# Altium PCB PCB1.PcbDoc
Units mil, origin at the board's own origin, x right, y up, seen from the top; angles counter-clockwise.
Board outline 999.85 x 2459.78 mil, 2 copper layers (Top Layer, Bottom Layer); 18 components, 21 nets, 95 pads, 47 vias.
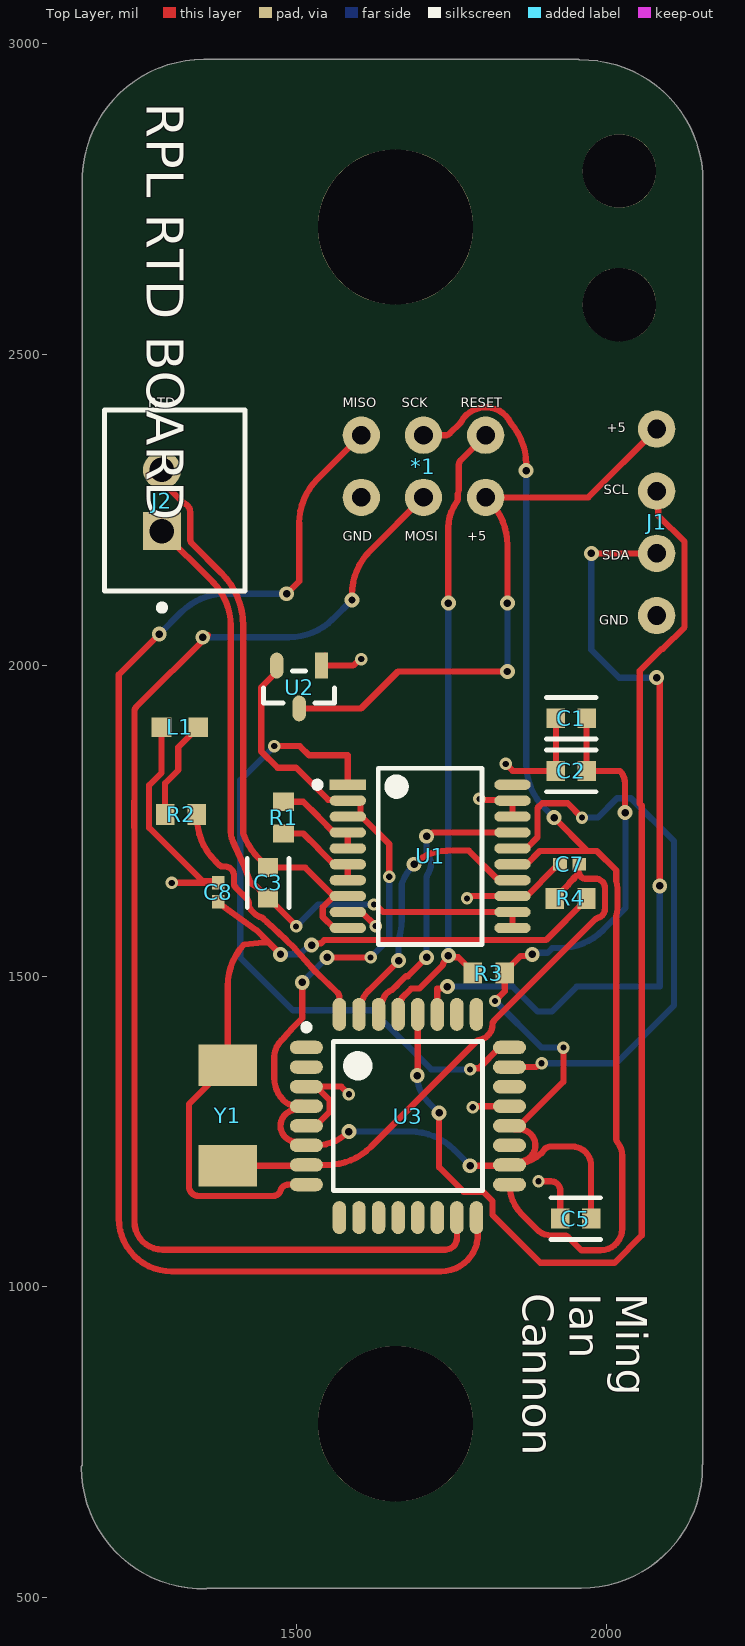
[diagram p0: Top Layer view]
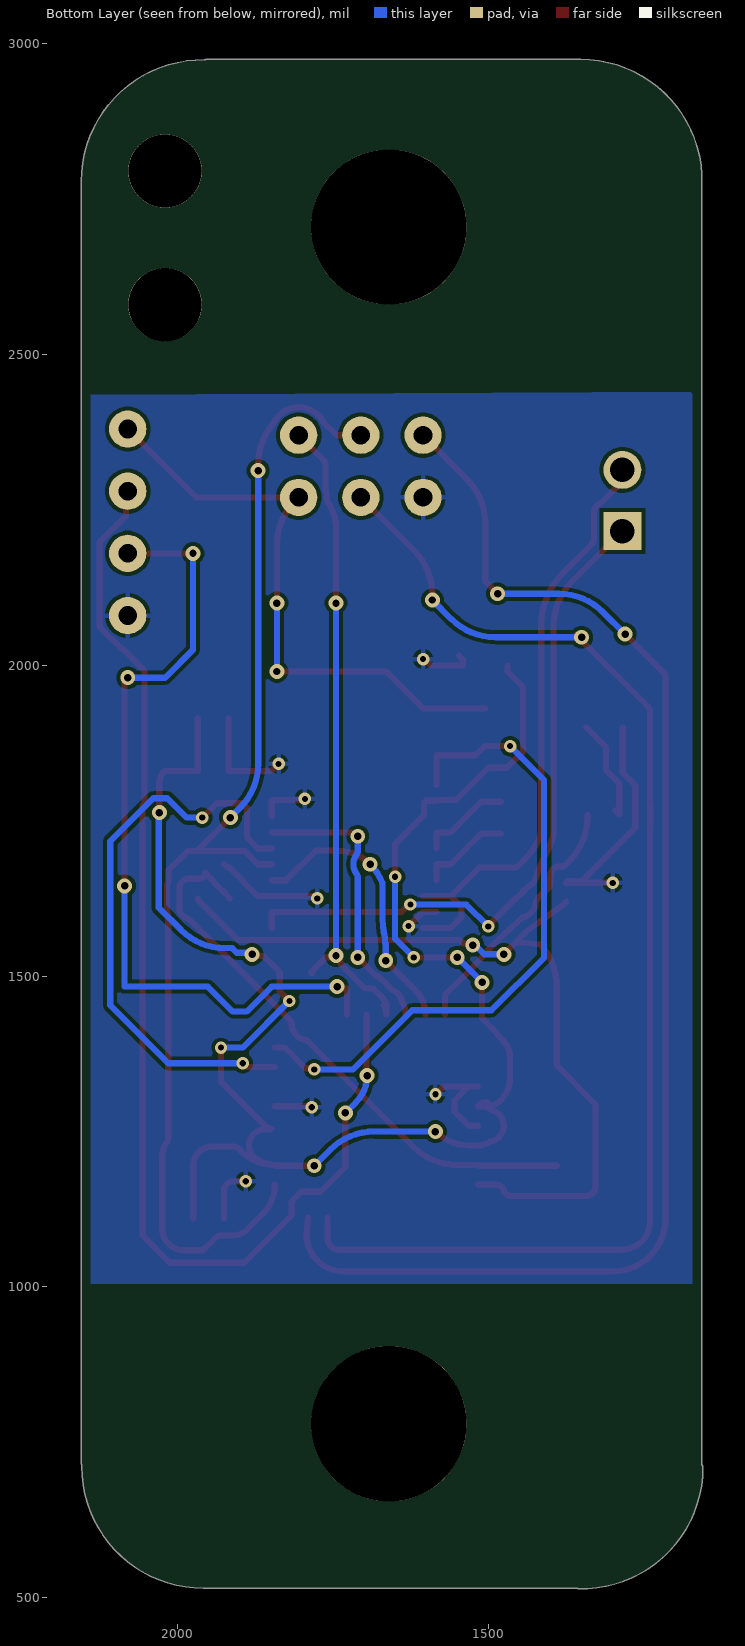
[diagram p1: Bottom Layer view, seen from below]

## Layer stack, top to bottom
Top Solder: solder mask 0.4, Solder Resist, Dk 3.5
Top Layer: signal copper 1.4
Dielectric 1: dielectric 12.6, FR-4, Dk 4.8
Bottom Layer: signal copper 1.4
Bottom Solder: solder mask 0.4, Solder Resist, Dk 3.5

## Board outline
1154.72,710 cw(c1159.74,710) 1156.32,713.67 1156.32,2774.22 cw(c1351.54,2779.29) 1351.53,2974.57 1953.39,2974.57 cw(c1953.39,2969.55) 1956.19,2973.72 cw(c1959.29,2778.46) 2154.57,2778.47 2154.57,716.61 cw(c2149.55,716.61) 2153.72,713.81 cw(c1957.85,710.71) 2153.74,710.71 cw(c1958.46,710.71) 1958.47,515.43 1357.46,515.43 cw(c1355.01,519.8) 1355.14,514.79 cw(c1350,710)

## Design rules (kind name [scope] priority, off if disabled: settings)
BoardOutlineClearance [All] p1: gap=15 ignorepadtopadclearanceinfootprint=FALSE
Clearance [All] p1: gap=6 ignorepadtopadclearanceinfootprint=FALSE except(0: Arc-Hole Track-Hole SMDPad-Hole THPad-Hole Via-Hole Fill-Hole Poly-Hole Region-Hole Text-Hole)
DiffPairsRouting [All] p1: maxlimit=393.7 minlimit=6 mostfreqgap=8 toplayer_minwidth=6 toplayer_maxwidth=15 toplayer_prefwidth=8 bottomlayer_minwidth=6 bottomlayer_maxwidth=15 bottomlayer_prefwidth=8 maxuncoupledlength=500
HoleSize [All] p1: absolutevalues=TRUE maxlimit=250 minlimit=10 maxpercent=80.000 minpercent=20.000
HoleToHoleClearance [All] p1: gap=10 allowstackedmicrovias=FALSE
MinimumAnnularRing [All] p1: minimumring=5
MinimumSolderMaskSliver [All] p1: minsoldermaskwidth=4
PlaneClearance [All] p1: clearance=10
PlaneConnect [All] p1: planeconnectstyle=Direct reliefexpansion=16 reliefentries=4 reliefconductorwidth=6 reliefairgap=6
PolygonConnect [All] p1: connectstyle=Relief reliefconductorwidth=8 reliefentries=4 polygonreliefangle="90 Angle" airgapwidth=6
RoutingCorners [All] p1: cornerstyle=45-Degree minsetback=49.21 maxsetback=49.21
RoutingVias [All] p1: holewidth=12 width=22 viastyle="Through Hole" minholewidth=10 minwidth=20 maxholewidth=250 maxwidth=260
SilkToSilkClearance [All] p1: silktosilkclearance=0
SilkToSolderMaskClearance [IsPad] p1: minsilkscreentomaskgap=2 clearancetoexposedcopper=FALSE
SolderMaskExpansion [All] p1: expansion=2.95 istentingtop=FALSE
Width [All] p1: maxlimit=400 minlimit=6 preferedwidth=8
21 further rules are at their usual default settings.

## Components (designator, comment, footprint, x,y, rotation, side; value= is the part's Value field where it differs from the comment)
*1 "AVR ISP 6 PIN HEADER" "AVR ISP 6 PIN HEADER" 1605,2370 r0 top
C1 "100nF" FP-GCM188-0_1-IPC_C 1942.73,1914.81 r0 top
C2 "100nF" FP-GCM188-0_1-IPC_C 1942.73,1830 r180 top
C3 "100nF" FP-GCM188-0_1-IPC_C 1455,1650 r90 top
C5 "100nF" FP-GCM188-0_1-IPC_C 1950,1110 r0 top
C7 "30pF" CAPC1005X06L 1940,1680 r180 top
C8 "30pF" CAPC1005X06L 1375,1635 r90 top
J1 "JST-XH 4" C146120 2080,2080 r90 top
J2 "JST-XH 2" FP-B2B-XH-A_LF_SN-MFG 1305,2265 r90 top
L1 "Blue LED 0603" C72041 1283.66,1900 r0 top
R1 "5k1" RESC1608X06L 1480,1755 r90 top
R2 "330" RESC1608X06L 1315,1760 r0 top
R3 "10k" RESC1608X06L 1810,1505 r0 top
R4 "1MOhm" RESC1608X06L 1941.51,1625 r0 top
U1 "RTD-DIGITAL CONVERTER" FP-A20-1-IPC_C 1715.75,1692.64 r0 top
U2 "C183880" FP-SOT23-IPC_C 1505,1965 r270 top
U3 "ATMEGA328P-AU" 32A_L 1680,1275 r0 top
Y1 "8Mhz Oscillator" C115962 1390,1195 r90 top

## Footprints (in the part's own frame and the unit in brackets; to place one, negate y for a bottom-side part, rotate by r counter-clockwise, add the part's x,y. Pads: shape width x height; smd on the part's side, far side on the other; paste and mask are expansions set on the pad)
32A_L [mm] "Thin QFP, 32-Leads, Body 7x7mm, Pitch 0.8mm, IPC High Density"
  oval 1.35x0.55 smd: 1(-4.15,2.8) 2(-4.15,2) 3(-4.15,1.2) 4(-4.15,0.4) 5(-4.15,-0.4) 6(-4.15,-1.2) 7(-4.15,-2) 8(-4.15,-2.8) 17(4.15,-2.8) 18(4.15,-2) 19(4.15,-1.2) 20(4.15,-0.4) 21(4.15,0.4) 22(4.15,1.2) 23(4.15,2) 24(4.15,2.8)
  oval 0.55x1.35 smd: 9(-2.8,-4.15) 10(-2,-4.15) 11(-1.2,-4.15) 12(-0.4,-4.15) 13(0.4,-4.15) 14(1.2,-4.15) 15(2,-4.15) 16(2.8,-4.15) 25(2.8,4.15) 26(2,4.15) 27(1.2,4.15) 28(0.4,4.15) 29(-0.4,4.15) 30(-1.2,4.15) 31(-2,4.15) 32(-2.8,4.15)
  silkscreen extent -4.27,-3.05 3.05,3.75, body extent -3.5,-3.5 3.5,3.5, height 1.2
"AVR ISP 6 PIN HEADER" [mil]
  round 60 hole 30: 1(0,0) 2(100,0) 3(200,0) 4(0,-100) 5(100,-100) 6(200,-100)
C72041 [mm]
  rect 0.8x0.8 smd: 1(0,0) 2(1.5,0)
C115962 [mm]
  rect 1.7x2.4 smd: 1(0,0) 2(4.1,0)
C146120 [mil]
  round 60 hole 30: 1(0,0) 2(100,0) 3(200,0) 4(300,0)
CAPC1005X06L [mm] "Chip Capacitor, 2-Leads, Body 1.00x0.50mm, IPC High Density"
  rect 0.56x0.52 smd: 1(-0.39,0) 2(0.39,0)
  body extent -0.53,-0.28 0.53,0.28, height 0.55
FP-A20-1-IPC_C [mm]
  rect 1.482x0.418 smd paste+0 mask+0: 1(-3.364,2.925)
  rrect100% 1.482x0.418 smd paste+0 mask+0: 2(-3.364,2.275) 3(-3.364,1.625) 4(-3.364,0.975) 5(-3.364,0.325) 6(-3.364,-0.325) 7(-3.364,-0.975) 8(-3.364,-1.625) 9(-3.364,-2.275) 10(-3.364,-2.925) 11(3.364,-2.925) 12(3.364,-2.275) 13(3.364,-1.625) 14(3.364,-0.975) 15(3.364,-0.325) 16(3.364,0.325) 17(3.364,0.975) 18(3.364,1.625) 19(3.364,2.275) 20(3.364,2.925)
  silkscreen extent -4.73,-3.6 2.12,3.6, body extent -4.2,-3.7 4.2,3.7, height 0.25
FP-B2B-XH-A_LF_SN-MFG [mm]
  rect 1.55x1.55 hole 1 paste-1000 mask+0: 1(-1.25,0.525)
  round 1.55 hole 1 paste-1000 mask+0: 2(1.25,0.525)
  silkscreen extent -4.5,-2.87 3.7,2.88, body extent -3.8,-2.98 3.8,2.98, height 0.25
FP-GCM188-0_1-IPC_C [mil]
  rect 29.87x31.97 smd paste+0 mask+0: 1(-24.67,0) 2(24.67,0)
  silkscreen extent -40,-33 40,33, body extent -44,-22 44,22, height 10
FP-SOT23-IPC_C [mm]
  rect 1.059x0.547 smd paste+0 mask+0: 1(-0.877,0.915)
  rrect100% 1.059x0.547 smd paste+0 mask+0: 2(-0.877,-0.915) 3(0.877,0)
  silkscreen extent -0.65,-1.45 0.65,1.45, body extent -1.51,-1.55 1.51,1.55, height 0.25
RESC1608X06L [mm] "Chip Resistor, 2-Leads, Body 1.60x0.85mm, IPC High Density"
  rect 0.75x0.85 smd: 1(-0.65,0) 2(0.65,0)
  body extent -0.87,-0.48 0.87,0.48, height 0.55

## Part data
C1 C2 C3 C5: library part C307331, Case/Package=0603, Dielectric=X8R, Max Operating Temperature=150°C, Min Operating Temperature=-55°C, Tolerance=10%, Voltage Rating (DC)=25V, Capacitance=100nF, Depth=0.8mm, Lead Free="Lead Free", Length=1.6mm, Packaging="Tape and Reel", Supplier 1=Digi-Key
C7 C8: library part C1570
J1: library part C146120
J2: library part C20079, "CONN HEADER VERT 2POS 2.5MM", Color=Natural, Contact Resistance=20mR, Current Rating=3A, Housing Color=White, Insulation Resistance=1GR, Max Operating Temperature=85°C, Max Voltage Rating (AC)=250V, Min Operating Temperature=-25°C, Supplier Part Number 1=8201554, Connector Type="Male Pin", Contact Material=Brass, Contact Plating=Tin, Contact Type="Male Pin", Depth=5.75mm, Fastening Type=Detent, Housing Material=Polyamide, Lead Free="Lead Free", Lead Pitch=2.5mm, Length=7.4mm, Max Current Rating=3A, Max Voltage Rating (DC)=250V, Mount="Through Hole", Number of Contacts=2, Number of Positions=2, Number of Rows=1, Orientation=Straight, Packaging=Bulk, Pitch=2.5mm, REACH SVHC="No SVHC", Series=XH, Supplier 1=RSComponents, Termination=Solder, Voltage Rating=250V, Voltage Rating (AC)=250V, Wire/Cable Gauge=22AWG
L1: library part C72041, "Blue 465~475nm 0603 Light Emitting Diodes (LED) ROHS"
R1: library part C23186, Manufacturer=Panasonic, Part Number=ERJ-3EKF5101V
R2: library part C23138, Manufacturer=Panasonic, Part Number=ERJ1GNF1004C
R3: library part C25804, Manufacturer=Panasonic, Part Number=ERJ-3EKF5101V
R4: library part C22935, Manufacturer=Panasonic, Part Number=ERJ1GNF1004C
U1: library part C779509, "IC RTD TO DIGITAL CONVERT 20SSOP", Case/Package=SSOP, Max Operating Temperature=125°C, Min Operating Temperature=-40°C, Mount="Surface Mount", Output Type=SPI, Packaging="Tape and Reel"
U2: library part LN1121P332MR-G, "6V - - - Fixed 3.3V SOT-23-3L Linear Voltage Regulators (LDO) ROHS", Dropout Voltage=300mV, Manufacturer="Diodes Inc.", Manufacturer Part Number=AP2120N-3.3TRG1, Max Junction Temp=+85°C, Max Supply Voltage=6V, Min Supply Voltage=2V, Nominal Supply Current=25uA, Output Current=150mA, Output Voltage=3.3V, Package=SOT23, Temperature="-40°C to +85°C", Temperature Range Low=-40°C, Accuracy Percentage=2%, Automotive=No, Category=IC, ComponentLink2Description=Datasheet, ComponentLink2URL=https://www.diodes.com/assets/Package-Files/SOT23.pdf, Device Class L1="Integrated Circuits (ICs)", Device Class L2="Power Management ICs", Device Class L3="Voltage Regulators - Linear", Digikey Description="IC REG LINEAR 3.3V 150MA SOT23", Footprint Url=https://www.diodes.com/assets/Package-Files/SOT23.pdf, Height=1.1mm, Ipc Land Pattern Name=SOT92P240X102-3, Lead Free=Yes, Mouser Description="AP2120 Series 3.3 V 0.15 A Surface Mount CMOS LDO Regulator - SOT23", Number Of Outputs=1, Octopart=https://octopart.com/ap2120n-3.3trg1-diodes+inc.-30954573, Output Type=Fixed, RoHS=TRUE, Standoff Height=0.013mm, Temperature Range High=+85°C
U3: library part C14877, "8-bit AVR Microcontroller, 32KB Flash, 1KB EEPROM, 2KB SRAM, 32-pin TQFP, Industrial Grade (-40°C to 85°C)", Supplier Part Number 1=1310271, Code_JEDEC=MS-026-ABA, ComponentLink1Description="Manufacturer URL", ComponentLink1URL=http://www.atmel.com/, ComponentLink2Description="ATmega48A/48PA/88A/88PA/168A/168PA/328/328P Datasheet", ComponentLink2URL=http://www.atmel.com/dyn/resources/prod_documents/doc8271.pdf, ComponentLink3Description="ATmega48A/48PA/88A/88PA/168A/168PA/328/328P Summary", ComponentLink3URL=http://www.atmel.com/dyn/resources/prod_documents/8271S.pdf, DatasheetVersion="revD, May-2011", PackageDescription="32-Lead, 7x7x1.0 mm Body, 0.8mm Lead Pitch, Thin Profile Plastic Quad Flat Package (TQFP)", PackageReference=32A, PackageVersion="revC, Oct-2010", RevisionNote="DatasheetVersion & PackageVersion updated. URLs added.", Supplier 1=RSComponents
Y1: library part C115962, "Resistance Weld Crystal, 8 MHz, +/- 30 ppm, -20 to 70 degC, 2-Pin SMD, RoHS, Tape and Reel", Case/Package=SMD/SMT, ESR (Equivalent Series Resistance)=80Ohm, Frequency=8MHz, Frequency Stability=50ppm, Frequency Tolerance=30ppm, Load Capacitance=20pF, Manufacturer="FOX Electronics", Max Operating Temperature=70degC, Min Operating Temperature=-20degC, Package Description="2-Pin Surface Mount Device, Body 5 x 11.7 mm", Package Quantity=1000, Package Reference=HC49SDLF, Datasheet URL=http://www.foxonline.com/pdfs/hc49sdlf.pdf, Datasheet Version=42064.0, Depth=5mm, Height=4.5mm, Lead Free=LeadFree, Length=11.7mm, Manufacturer URL=http://www.foxonline.com/, Mount=SurfaceMount, Number of Pins=2, Packaging=TapeandReel, Radiation Hardening=No, REACH SVHC=NoSVHC, RoHSCompliant=True, Series Resistance=80Ohm, Termination=SMD/SMT, Tolerance=50ppm, Width=5mm

## Free pads (board coordinates)
  round 250 hole 250: 0(1660,780) 0(1660,2705)
  round 118.11 hole 118.11 unplated paste-99999: 0(2020,2580)
  round 118.11 hole 118.11 unplated paste+0 mask+2.95: 0(2020,2795)

## Via types
v1: diameter 24, hole 12, Top Layer to Bottom Layer, 28 vias
v2: diameter 20, hole 10, Top Layer to Bottom Layer, 19 vias

## Nets (pads, with @x,y where several pads share a name; then routed paths per layer and width w, separated by ;. In a path a pad name is that pad's centre, name@x,y a point inside that pad or via, vN(x,y) a via of type N, cw(c..) or ccw(c..) an arc to the next point about the centre after c; other vN are vias at no path point)
3V3: C1.2 C2.1 C5.2 R3.2 U1.2 U1.3 U2.2 U3.4 U3.6 U3.18 U3.20 | length 2770.4
  Top Layer w10: U2.2 1468.98,1989.44 1444,1964.46 1444,1861.3 1470.3,1835 1500,1835 1551.56,1783.44 1582.09,1783.44 U1.2 1600.53,1782.2 1603.51,1779.22 1603.51,1758.97 1650,1712.49 v2(1650,1660) ; U3.4@1498.1,1286.61 cw(c1491.07,1293.71) 1493.85,1284.11 ccw(c1500.87,1259.25) 1495.55,1233.98 cw(c1493.52,1224.19) 1498.67,1232.76 ccw(c1516.61,1262.45) U3.6 1531.3,1227.76 ccw(c1531.3,1303.7) v1(1585,1250) ; U3.4@1500.87,1296.42 1506.97,1296.42 cw(c1506.92,1286.42) 1514.28,1293.19 ccw(c1568.79,1342.93) 1516.39,1290.97 cw(c1509.25,1283.97) 1516.54,1290.81 1516.54,1290.75 1502.34,1290.75 cw(c1502.34,1322.34) 1480,1300 cw(c1516.21,1336.21) 1465,1336.21 1465,1370 cw(c1501.21,1370) 1475.61,1395.61 1480,1400 1495,1417.31 1510,1432.31 v1(1510,1490) ; v1(1550,1530) v2(1620,1530) ; v1(1780,1195) 1840.34,1195 ccw(c1840.34,1199.3) U3.18 ; v2(1820,1460) 1835.59,1475.59 R3.2 1835.59,1506.97 1860.94,1532.32 1877.32,1532.32 v1(1880,1535) ; v2(1930,1385) 1930,1330.12 1854.36,1254.48 1849.06,1254.48 ccw(c1853.2,1263.58) 1853.2,1253.58 1859.13,1253.58 cw(c1859.13,1227.76) 1867.54,1203.33 ccw(c1870.83,1193.89) 1865.69,1202.47 cw(c1843.39,1239.41) U3.18 ; C1.2 C2.1 2020.89,1830 cw(c2000.75,1809.86) 2029.23,1809.86 v1(2029.23,1763.09) ; C5.2 1974.67,1195 ccw(c1943.69,1195) 1943.69,1225.99 1910.39,1225.99 ccw(c1910.39,1210.99) 1897.16,1218.06 cw(c1888.37,1222.82) 1894.89,1215.24 cw(c1843.39,1275.62) U3.18
  Bottom Layer w10: v1(1510,1490) v1(1550,1530) ; v1(1585,1250) 1683.58,1250 cw(c1683.58,1150) 1754.29,1220.71 v1(1780,1195) ; v2(1620,1530) 1650,1560 v2(1650,1660) ; v2(1820,1460) 1895,1385 v2(1930,1385) ; v1(1880,1535) 1882.68,1537.68 1904.68,1537.68 1912,1545 1923.58,1545 ccw(c1923.58,1645) 1994.29,1574.29 2030,1610 2030,1761.25 ccw(c2027.39,1761.25) v1(2029.23,1763.09)
+5: *1.6 J1.4 U2.3 | length 962.3
  Top Layer w10: U2.3 1604.5,1930.48 1664.02,1990 v1(1840,1990) ; *1.6 1970,2270 J1.4 ; *1.6@1810.71,2264.29 cw(c1740,2193.58) 1840,2193.58 v1(1840,2100)
  Bottom Layer w10: v1(1840,1990) v1(1840,2100)
GND: *1.4 C1.1 C2.2 C5.1 C7.2 C8.2 J1.1 L1.1 U1.9 U1.13 U1.18 U1.19 U2.1 U3.3 U3.5 U3.21 | length 1277.7
  Top Layer w10: L1.1 1283.66,1826.94 1263.65,1806.93 1263.65,1738.71 1349.76,1652.59 1372.76,1652.59 C8.2 1300.35,1650.35 v2(1300,1650) ; U3.5 1531.73,1259.25 1554.19,1281.71 1554.19,1300.42 U3.3@1532.36,1322.24 ; U3.3 U3.3@1532.36,1322.24 ; U2.1@1546.79,2015.36 1541.02,2009.59 U2.1 1591.81,1999.52 1602.29,2010 v2(1605,2010) ; U1.9 1605.87,1603.07 1628.32,1580.62 v2(1628.32,1580.4) ; v2(1585,1310) 1572.76,1322.24 U3.3@1532.36,1322.24 ; v2(1775,1625) 1777.71,1625 1781.37,1628.66 1870.74,1628.66 1916.84,1674.76 1919.41,1674.76 C7.2 ; v2(1784.14,1289.07) 1785.83,1290.75 U3.21 ; v2(1795,1785) 1796.56,1783.44 1846.95,1783.44 U1.19 U1.18 ; v2(1837.39,1841.28) 1848.67,1830 C2.2 C1.1 ; v2@1891.91,1171.91 v2(1890,1170) 1910,1170 cw(c1910,1155) 1925,1155 1925,1110 C5.1
LED: R2.2 U3.32 | length 418.9
  Top Layer w10: R2.2 1340.88,1748.27 1340.88,1748.16 ccw(c1440.59,1755.83) 1369.86,1685.14 1375.67,1679.33 ccw(c1382.76,1686.38) 1382.76,1676.38 1385.24,1676.38 cw(c1385.24,1661.38) 1400.24,1661.38 1400.24,1649.14 ccw(c1410.24,1649.14) 1403.18,1642.06 1421.1,1624.13 cw(c1414.01,1617.08) 1424.01,1617.08 1424.01,1612.76 1428.01,1605.83 1434.46,1599.39 1440.93,1595.38 cw(c1440.47,1585.39) 1447.52,1592.48 cw(c1440.47,1585.39) 1447.6,1592.4 1453.46,1586.54 1484.53,1558 1498,1544.53 1531.48,1506.96 ccw(c1560,1535) 1532.38,1506.07 1566.67,1473.33 cw(c1559.76,1466.09) 1566.85,1473.15 cw(c1559.76,1466.09) 1569.76,1466.09 U3.32
MISO: *1.1 U3.16 | length 2182.3
  Top Layer w10: v1(1280,2050) 1215,1985 1215,1110 ccw(c1300,1110) 1300,1025 1733.24,1025 ; v1(1485,2115) 1505,2135 1505,2228.58 cw(c1605,2228.58) 1534.29,2299.29 *1.1 ; 1733.28,1025 ccw(c1733.28,1084.2) 1791.74,1093.51 cw(c1801.63,1095.01) 1791.66,1094.13 1791.66,1094.19 U3.16
  Bottom Layer w10: v1(1280,2050) 1315.71,2085.71 cw(c1386.42,2015) 1386.42,2115 v1(1485,2115)
MOSI: *1.5 U3.15 | length 2058.4
  Top Layer w10: v1(1350,2045) ccw(c1350,2057.07) 1358.52,2048.52 1242.91,1932.91 ccw(c1250,1925.86) 1240,1925.86 1240,1782.32 cw(c1230,1782.36) 1239.93,1781.15 ccw(c1274.65,1776.73) 1239.65,1776.73 1239.65,1743.27 ccw(c1274.65,1743.27) 1239.93,1738.85 cw(c1230,1737.64) 1240,1737.68 1240,1105.31 ccw(c1285.31,1105.31) 1285.31,1060 1740,1060 ccw(c1740,1078.74) 1758.74,1078.74 U3.15 ; v1(1590,2105) 1590,2113.58 cw(c1690,2113.58) 1619.29,2184.29 *1.5
  Bottom Layer w10: v1(1350,2045) 1488.58,2045 ccw(c1488.58,2145) 1559.29,2074.29 v1(1590,2105)
NetC3_1: C3.1 J2.1 U1.11 U1.12 | length 1109.3
  Top Layer w10: J2.1 1365.71,2134.41 cw(c1295,2063.69) 1395,2063.69 1395,1731.51 ccw(c1425,1731.52) 1396.5,1722.15 ccw(c1415.52,1728.33) 1396.53,1722.04 ccw(c1415.52,1728.33) 1396.63,1721.77 ccw(c1510,1761.1) 1400.94,1711.04 1417.04,1675.99 cw(c1385.24,1661.38) 1418.16,1673.25 1424.92,1654.59 ccw(c1439.01,1659.74) 1432.42,1646.27 1434.14,1645.42 cw(c1429.74,1636.44) 1436.7,1643.62 1436.76,1643.57 1444.21,1636.12 1444.21,1635.26 C3.1 1456.05,1625.33 1500,1581.38 v2(1500,1580) ; v2(1625.27,1615.16) 1627.98,1615.16 1640.06,1603.07 U1.12 U1.11
  Bottom Layer w10: v2(1500,1580) 1535.16,1615.16 v2(1625.27,1615.16)
NetC3_2: C3.2 J2.2 U1.8 U1.10 | length 982.6
  Top Layer w10: J2.2 1284.33,2300.2 ccw(c1294.33,2300.2) 1287.25,2293.14 1318.61,2261.77 ccw(c1325.72,2268.81) 1321.33,2259.82 cw(c1314.84,2246.3) 1329.84,2246.3 1329.84,2202.7 ccw(c1339.84,2202.7) 1332.75,2195.65 1380,2148.4 cw(c1295,2063.69) 1415,2063.69 1415,1731.47 ccw(c1425,1731.52) 1415.52,1728.33 ccw(c1510,1761.1) 1439.31,1690.37 1443.91,1685.76 1444.01,1684.61 C3.2 1514.75,1674.67 U1.8@1560.77,1628.66 ; U1.10@1605.87,1577.48 U1.10 1560.77,1577.48 1543.14,1595.11 1543.14,1611.03 U1.8@1560.77,1628.66 ; U1.8@1605.88,1628.66 U1.8 U1.8@1560.77,1628.66
NetL1_2: L1.2 R2.1 | length 171
  Top Layer w10: R2.1@1295.71,1766.3 R2.1 1289.41,1810.06 1310.69,1831.34 1310.69,1867.97 L1.2
NetR1_1: R1.1 U1.6 U1.7 | length 149.8
  Top Layer w10: R1.1 1511.73,1729.41 1535.6,1705.55 1535.6,1705.01 1560.77,1679.84 U1.6 U1.7
NetR1_2: R1.2 U1.4 U1.5 | length 149.8
  Top Layer w10: R1.2 1511.73,1780.59 1535.6,1756.73 1535.6,1756.19 1560.77,1731.02 U1.4 U1.5
NetU1_1: U1.1 U3.24 | length 1056.9
  Top Layer w10: v2(1465,1870) 1506,1870 1520.85,1855.16 1583.32,1855.16 U1.1 ; v2(1780,1350) 1781.91,1351.91 1794.32,1351.91 1827.64,1385.24 U3.24
  Bottom Layer w10: v2(1465,1870) 1410.35,1815.35 1410.35,1529.65 1495,1445 1622.53,1445 1717.53,1350 v2(1780,1350)
NetU1_16: U1.16 U3.23 | length 938.3
  Top Layer w10: U3.23 1886.03,1353.74 1892.29,1360 v2(1895,1360) ; U1.16 1870.74,1705.43 1888.36,1723.06 1888.36,1770.42 1895.94,1778 1937,1778 v2(1960,1755)
  Bottom Layer w10: v2(1895,1360) 2015,1360 2108,1453 2108,1716.86 2038.76,1786.09 2016.28,1786.09 1985.19,1755 v2(1960,1755)
RESET: *1.3 R3.1 U3.29 | length 1062
  Top Layer w10: U3.29@1668.54,1452.77 ccw(c1690.48,1438.39) U3.29 1664.25,1457.29 1669.92,1462.96 1669.92,1464.83 1685.05,1479.96 1698.14,1479.96 1736.59,1518.41 1736.59,1520.14 1737,1520.55 1737,1521.21 1745,1529.21 v1(1745,1533) 1747.68,1530.32 1761.06,1530.32 1784.41,1506.97 R3.1 cw(c1782.98,1505) R3.1@1783.99,1503.99 ; v1(1745,2100) 1745,2221.72 cw(c1813.28,2221.72) 1758.15,2262 ccw(c1750.04,2267.85) 1760.04,2268.22 cw(c1805,2270) 1761.56,2281.76 ccw(c1751.9,2284.32) 1761.9,2284.28 1761.9,2322.76 cw(c1771.9,2322.76) 1764.81,2329.81 *1.3
  Bottom Layer w10: v1(1745,1533) v1(1745,2100)
SCK: *1.2 U1.15 U3.17 | length 1922.5
  Top Layer w10: *1.2 1740.24,2370 ccw(c1740.24,2380) 1747.3,2372.91 1763.99,2389.6 ccw(c1756.88,2396.64) 1765.61,2391.77 cw(c1805,2370) 1845.95,2388.65 cw(c1770.16,2323.42) 1870.16,2323.42 v1(1870.16,2313) ; U3.17 ccw(c1911.35,1164.76) 1863.29,1116.71 1887.51,1092.49 ccw(c1910.39,1115.37) 1910.39,1083.01 1930.81,1083.01 cw(c1930.81,1073.01) 1937.87,1080.1 1958.95,1059.01 1989.61,1059.01 ccw(c1989.61,1094.01) 2024.61,1094.01 2024.61,1210.99 ccw(c1989.61,1210.99) 2017.11,1232.64 cw(c2025,1238.78) 2015,1238.74 2015,1595.5 cw(c2025,1595.46) 2015.4,1598.27 ccw(c1981.86,1608.27) 2016.86,1608.27 2016.86,1641.73 ccw(c1981.86,1641.73) 2015.4,1651.73 cw(c2025,1654.54) 2015,1654.5 2015,1670 1983.76,1701.24 1968.76,1701.24 ; U1.15 1870.74,1679.84 1892.13,1701.24 1968.76,1701.24 ; v1(1915,1755) 1968.76,1701.24
  Bottom Layer w10: v1(1870.16,2313) 1870.16,1841.26 ccw(c1970.16,1841.26) 1899.45,1770.55 v1(1915,1755)
SCL: J1.3 U3.28 | length 1927
  Top Layer w10: v1(1695,1340) ccw(c1693.19,1341.81) 1695.75,1341.81 U3.28 ; v1(1730,1280) 1730,1192.63 1769.44,1153.19 1800.93,1153.19 1816.06,1138.06 1816.06,1115.65 1892.7,1039.01 2012.39,1039.01 2056.23,1082.86 2056.23,1774.28 2053,1777.51 2053,1991.18 2088.09,2026.27 2089.91,2026.27 2125,2061.36 2125,2198.64 2082.78,2240.86 2082.78,2277.22 J1.3
  Bottom Layer w10: v1(1695,1340) ccw(c1755.36,1340) 1712.68,1297.32 v1(1730,1280)
SDA: J1.2 U3.27 | length 1323.6
  Top Layer w10: U3.27 1727.24,1480 1745,1480 1743.34,1481.66 v1(1743.34,1483.12) ; v1(1975,2180) J1.2 ; v1(2080,1980) 2085,1980 v1(2085,1645)
  Bottom Layer w10: v1(1743.34,1483.12) 1848.69,1483.12 1888.82,1443 1911.18,1443 1951.31,1483.12 2085,1483.12 v1(2085,1645) ; v1(1975,2180) 1975,2025 2020,1980 v1(2080,1980)
SDI: U1.14 U3.31 | length 456.2
  Top Layer w10: U3.31 cw(c1656.48,1438.39) 1617.43,1477.43 v1(1665,1525) ; v1(1690,1680) cw(c1742.18,1627.82) 1742.18,1701.61 ccw(c1742.18,1711.61) 1742.3,1701.61 1774.68,1702 1777.88,1702 1825.63,1654.25 U1.14
  Bottom Layer w10: v1(1665,1525) 1665,1552 1666,1553 1666,1560.7 ccw(c1550,1591.42) 1670,1591.42 1670,1646.68 cw(c1680,1646.64) 1670.65,1650.18 cw(c1750.36,1619.64) v1(1690,1680)
SDO: U1.17 U3.30 | length 463
  Top Layer w10: U3.30 cw(c1667.45,1438.39) 1637.77,1456.34 ccw(c1629.19,1461.48) 1638.97,1459.41 cw(c1664.25,1454.13) 1654.67,1478.12 ccw(c1650.9,1487.38) 1655.12,1478.31 1663.29,1486.49 cw(c1695.75,1454.13) 1663.4,1486.59 1676.77,1499.96 1679.96,1499.96 v1(1710,1530) ; v1(1710,1725) 1713.79,1725 1719.81,1731.02 U1.17
  Bottom Layer w10: v1(1710,1530) 1710,1658.39 cw(c1720,1658.34) 1711.88,1664.18 ccw(c1690,1680) 1711.87,1695.83 cw(c1720,1701.66) 1710,1701.61 v1(1710,1725)
XTAL_1: C7.1 R4.1 U3.7 Y1.1 | length 932.4
  Top Layer w10: Y1.1 1513.57,1195 ccw(c1513.57,1199.3) U3.7 1549.84,1196.26 ccw(c1549.84,1296.26) 1620.55,1225.55 1789.47,1394.47 cw(c1796.51,1387.36) 1794.73,1397.21 ccw(c1793.81,1407.16) 1796.89,1397.65 1797.72,1397.92 cw(c1800.81,1388.41) 1797.81,1397.95 ccw(c1790.24,1422.64) 1816.06,1422.16 cw(c1826.06,1421.91) 1818.95,1428.95 1981.2,1591.2 cw(c1988.24,1584.09) 1985.66,1593.76 ccw(c1981.86,1608.27) 1996.86,1608.27 1996.86,1641.73 ccw(c1981.86,1641.73) 1981.86,1656.73 1965.35,1656.73 cw(c1965.35,1666.73) 1955.35,1666.73 1947.19,1658.57 ccw(c1954.3,1651.54) 1946.55,1657.85 1943.53,1654.14 cw(c1935.77,1660.46) 1942.43,1652.99 ccw(c1952.33,1641.73) 1939.08,1648.76 ccw(c1952.33,1641.73) 1938.33,1647.1 ccw(c1965.35,1613.99) 1935.13,1644.21 1927.33,1636.41 1925.68,1636.41 R4.1 ; 1944.82,1654.71 ccw(c1939.75,1663.33) 1947.68,1657.24
XTAL_2: C8.1 R4.2 U3.8 Y1.2 | length 1329.3
  Top Layer w10: C8.1 1377.25,1617.06 1380.42,1613.89 1435.68,1574.32 1455.68,1554.32 ; 1463.82,1146.54 1342.76,1146.54 cw(c1342.76,1161.54) 1327.76,1161.54 1327.76,1294.17 Y1.2 1390,1483.61 cw(c1490,1483.61) 1416.18,1551.07 1447.4,1554.32 1455.68,1554.32 ; 1463.86,1146.54 ccw(c1463.86,1158.1) 1474.99,1154.97 cw(c1487.96,1151.29) 1487.97,1164.76 U3.8 ; v1(1475,1535) 1455.68,1554.32 ; v1(1525,1550) 1527.68,1552.68 1540.15,1552.68 1545.47,1558 1902.07,1558 1967.1,1623.03 R4.2
  Bottom Layer w10: v1(1475,1535) 1506.21,1535 1521.21,1550 v1(1525,1550)
pads on no net: U1.20 U3.1 U3.2 U3.9 U3.10 U3.11 U3.12 U3.13 U3.14 U3.19 U3.22 U3.25 U3.26

## Polygon pours and split planes (outlines as drawn)
GND on Bottom Layer "GND_L02_P000" (solid, pour order 0): 1165,2440 1160,2435 1160,1005 2150,1005 2145,1010 2145,2435

## Silkscreen, mask and mechanical layers (free items; w line width, h text height)
Top Overlay:
  text "RPL RTD BOARD" at 1260,2905 h60 r270
  text "RTD" at 1262.59,2414.91 h15
  text "MISO" at 1575,2415 h15
  text "SCK" at 1670,2415 h15
  text "RESET" at 1765,2415 h15
  text "+5" at 2000,2375 h15
  text "SCL" at 1995,2275 h15
  text "GND" at 1575,2200 h15
  text "MOSI" at 1675,2200 h15
  text "+5" at 1775,2200 h15
  text "SDA" at 1992.59,2169.91 h15
  text "GND" at 1987.59,2064.91 h15
  text "Ming  / Ian / Cannon" at 1865,990 h50 r270
Mechanical 1:
  lines w10: 1159.74,710 ccw(c1350,710) 1355.01,519.8 ; 1161.34,701.34 1161.34,2774.28 cw(c1351.54,2779.29) 1351.53,2969.55 1953.39,2969.55 ; 1355.65,520.45 1958.47,520.45 ccw(c1958.46,710.71) 2148.66,715.72 ; 1954.28,2968.66 cw(c1959.29,2778.46) 2149.55,2778.47 2149.55,716.61